# Altium PCB M.2-12V-LED-Regulator-Relay-copy_2024-05-01.pcbdoc
Units mil, origin at the board's own origin, x right, y up, seen from the top; angles counter-clockwise.
Board outline 6628.43 x 3773.75 mil, 2 copper layers (Top Layer, Bottom Layer); 48 components, 48 nets, 209 pads, 73 vias.
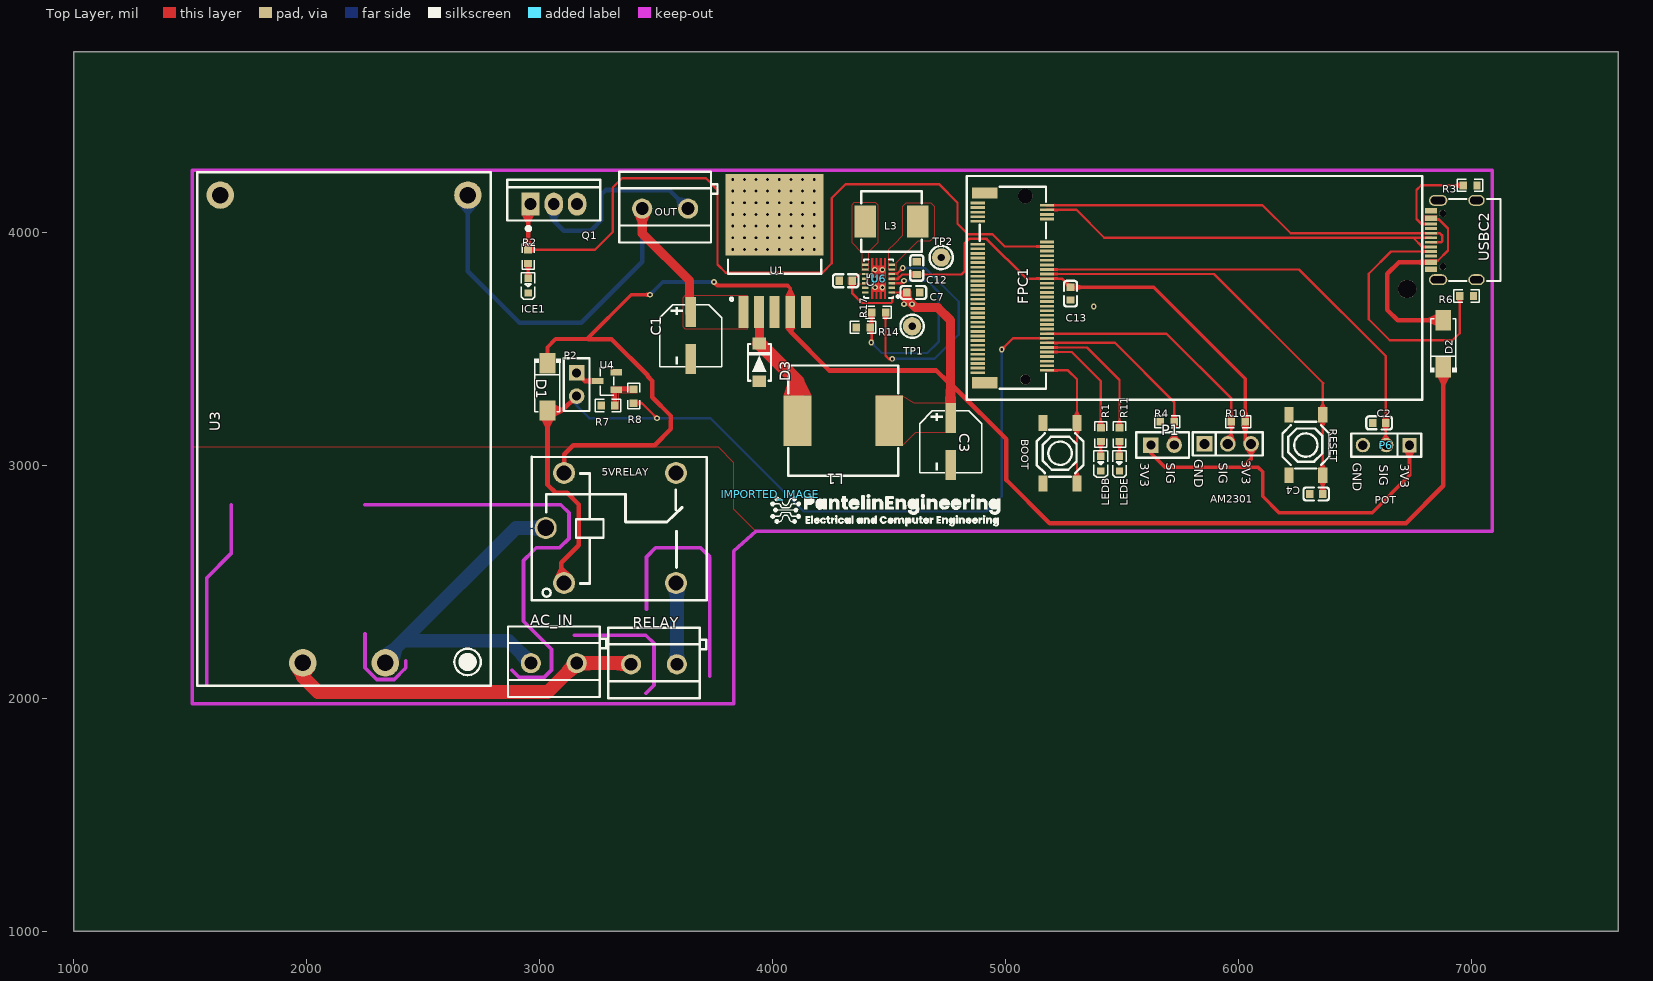
[diagram p0: Top Layer view]
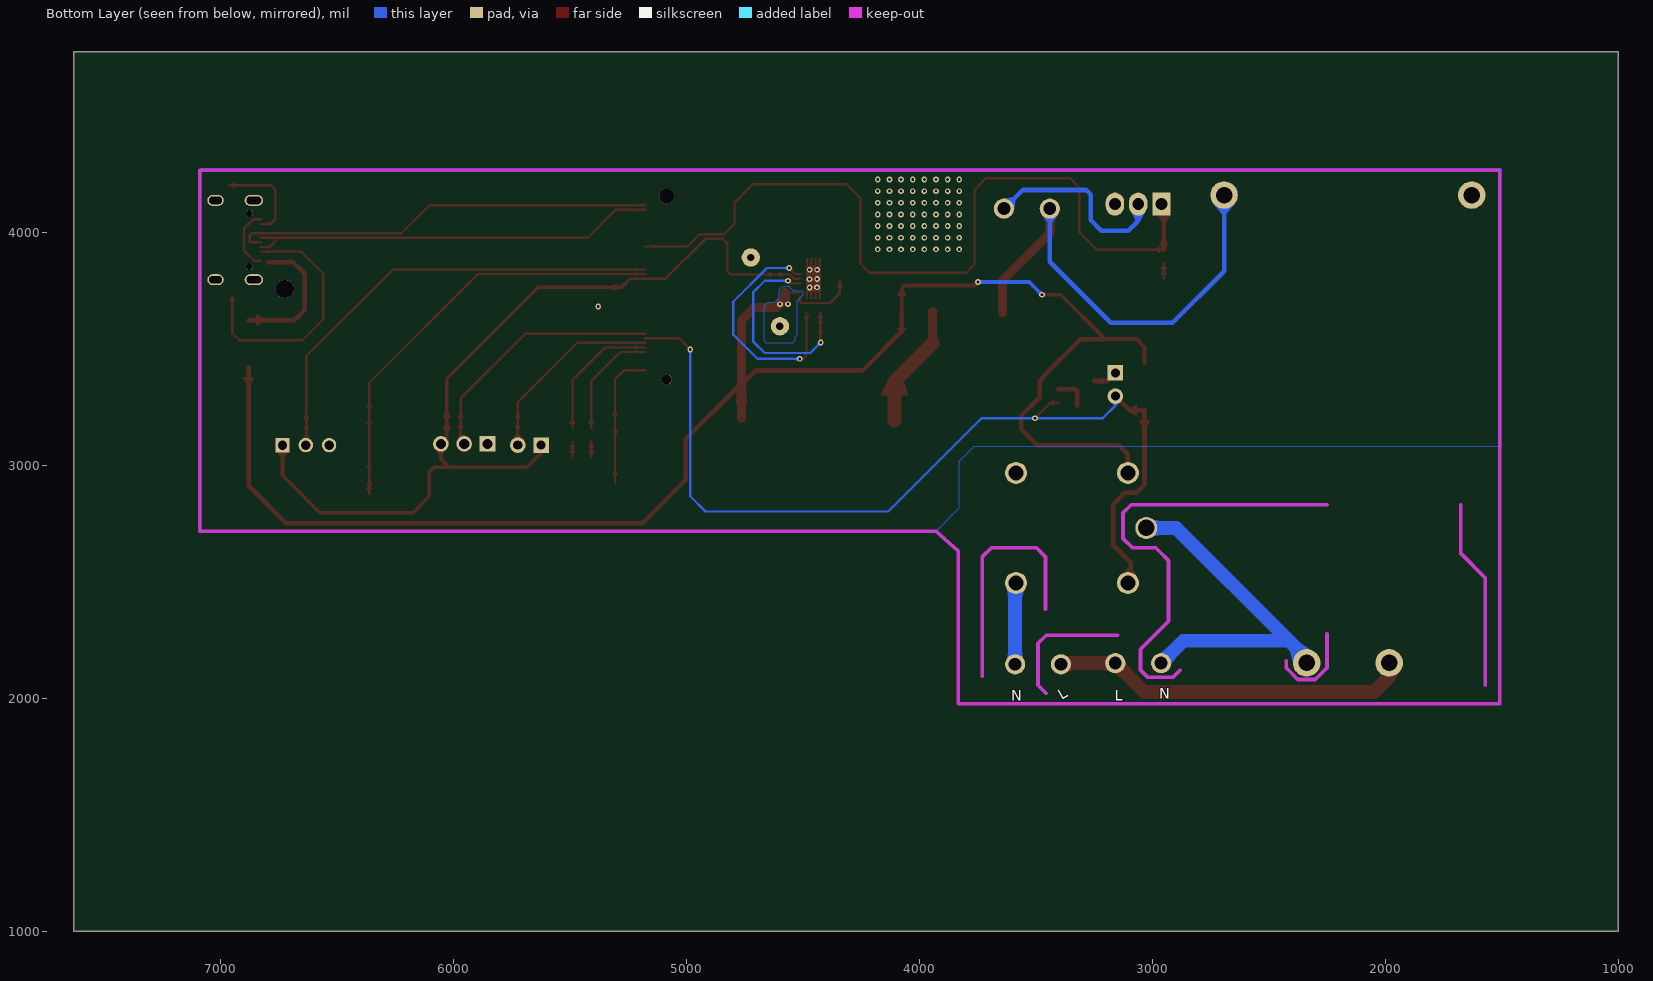
[diagram p1: Bottom Layer view, seen from below]

## Layer stack, top to bottom
Top Layer: signal copper (thickness not stored)
Dielectric: dielectric 12.6, FR-4, Dk 4.8
Bottom Layer: signal copper (thickness not stored)

## Board outline
7628.43,1000 1000,1000 1000,4773.75 7628.43,4773.75

## Components (designator, comment, footprint, x,y, rotation, side; value= is the part's Value field where it differs from the comment)
5VRELAY "SRD-05VDC" RELAY-TH_SRD-03VDC-SL-C 3305,2730.04 r0 top
AC_IN "VLT" CONN-TH_P5.00_KF301-5.0-2P 3060,2150.04 r0 top
AM2301 "1125" CONN-TH_1125-1103S0S113CR01 5952.87,3090.88 r0 top
BOOT "TS-1187A-B-A-B" SW-SMD_4P-L5.1-W5.1-P3.70-LS6.5-TL-2 5232.87,3050.88 r270 top
C1 "330uF" CAP-SMD_BD6.3-L6.6-W6.6-LS7.2-R-RD 3647.87,3555.88 r90 top
C2 "100nF" C0603 6602.87,3180.88 r0 top
C3 "330uF" CAP-SMD_BD6.3-L6.6-W6.6-LS7.2-R-RD 4762.87,3100.88 r90 top
C4 "100nF" C0603 6332.87,2875.88 r0 top
C5 "100n" C0603 4312.87,3790.88 r180 top
C7 "10u" C0603 4602.87,3740.88 r180 top
C12 "22u" C0603 4617.87,3845.88 r270 top
C13 "22u" C0603 5277.87,3735.88 r90 top
D1 "SS14" SMA_L4.2-W2.6-LS5.3-RD 3032.87,3335.88 r270 top
D2 "SS14" SMA_L4.2-W2.6-LS5.3-RD 6877.87,3520.88 r90 top
D3 "SS34" SMA(DO-214AC) 3942.87,3440.88 r90 top
FPC1 "AS0BC21-S30BM-7H" CONN-SMD_AS0BC21-S30BM-7H 5027.87,3760.88 r90 top
ICE1 "MHT192WDT-ICE" LED0603-RD 2950,3770.04 r90 top
IMPORTED_IMAGE "IMPORTED_IMAGE" IMPORTED_IMAGE 3989.91,2874.78 r0 top
L1 "47uH" IND-SMD_L12.0-W12.0_CDRH127NP 4302.87,3190.88 r180 top
L3 "1.5uH" IND-SMD_L7.2-W6.6_GPSR0730 4509.34,4045.23 r180 top
LEDB "FC-DA1608BK-470H10" LED0603-RD 5407.9,3005.9 r90 top
LEDE "XL-1608UGC-04" LED0603-RD_GREEN 5487.87,3005.88 r90 top
OUT "VLT" CONN-TH_P5.00_KF301-5.0-2P 3537.87,4100.88 r0 top
P1 "BUTTON_LED" HDR-TH_2P-P2.54-V-F 5672.86,3085.88 r0 top
P2 "RLY_JUMP" HDR-TH_2P-P2.54-V-F 3157.87,3345.88 r270 top
P6 "Header-Female-2.54_1x3" HDR-TH_3P-P2.54-V-F 6632.87,3085.88 r180 top
Q1 "IRF520P" TO-220-3_L10.0-W4.5-P2.54-T 3060,4120.04 r90 top
R1 "49.9Ω" R0603 5407.87,3130.88 r90 top
R2 "49.9Ω" R0603 2949.98,3895.06 r90 top
R3 "5.1kΩ" R0603 6992.87,4200.88 r180 top
R4 "430Ω" R0603 5692.87,3185.88 r0 top
R6 "5.1kΩ" R0603 6977.87,3725.88 r180 top
R7 "10k" R0603 3292.87,3255.88 r0 top
R8 "220" R0603 3402.87,3295.88 r90 top
R10 "10kΩ" R0603 5997.87,3185.88 r0 top
R11 "49.9Ω" R0603 5487.92,3130.87 r90 top
R14 "180k" R0603 4387.87,3590.88 r0 top
R17 "1M" R0603 4454.34,3655.23 r180 top
RELAY "VLT" CONN-TH_P5.00_KF301-5.0-2P 3490,2145.04 r0 top
RESET "TS-1187A-B-A-B" SW-SMD_4P-L5.1-W5.1-P3.70-LS6.5-TL-2 6287.87,3085.88 r270 top
TP1 "VIN" PKG-TEST-POINT-PTH-1X1 4597.87,3595.88 r180 top
TP2 "GND" PKG-TEST-POINT-PTH-1X1 4722.87,3890.88 r180 top
U1 "LM2596S-5.0" TO-263-5_L10.6-W9.6-P1.70-LS15.9-BR 4007.87,3865.88 r270 top
U3 "HLK-20M05" PWRM-TH_HLK-20MXX 2160,3155.04 r90 top
U4 "IRLML6244TR" SOT-23-3_L2.9-W1.3-P1.90-LS2.4-BR 3287.87,3360.88 r0 top
U6 "TPS63020DSJR" VSON-14_L4.0-W3.0-P0.50-BL-EP_TI_DSJ 4454.34,3800.23 r90 top
USBC2 "TYPE-C-31-M-12" USB-C_SMD-TYPE-C-31-M-12 6922.87,3965.88 r90 top
? "" ? 4297.87,2108.94 r0 top

## Footprints (in the part's own frame and the unit in brackets; to place one, negate y for a bottom-side part, rotate by r counter-clockwise, add the part's x,y. Pads: shape width x height; smd on the part's side, far side on the other; paste and mask are expansions set on the pad)
C0603 [mm]
  rect 0.8x0.9 smd paste+0 mask+0.051: 1(-0.7,0) 2(0.7,0)
  silkscreen extent -1.41,-0.71 1.39,0.72
CAP-SMD_BD6.3-L6.6-W6.6-LS7.2-R-RD [mm]
  rect 3.26x1.15 smd paste+0 mask+0.051: 1(2.555,0) 2(-2.555,0)
  silkscreen extent -3.39,-3.38 3.36,3.38
CONN-SMD_AS0BC21-S30BM-7H [mm]
  rect 0.3x1.55 smd paste+0 mask+0.05: 1(9.25,3.775) 2(9,-3.775) 3(8.75,3.775) 4(8.5,-3.775) 5(8.25,3.775) 6(8,-3.775) 7(7.75,3.775) 8(7.5,-3.775) 9(7.25,3.775) 18(5,-3.775) 19(4.75,3.775) 20(4.5,-3.775) 21(4.25,3.775) 22(4,-3.775) 23(3.75,3.775) 24(3.5,-3.775) 25(3.25,3.775) 26(3,-3.775) 27(2.75,3.775) 28(2.5,-3.775) 29(2.25,3.775) 30(2,-3.775) 31(1.75,3.775) 32(1.5,-3.775) 33(1.25,3.775) 34(1,-3.775) 35(0.75,3.775) 36(0.5,-3.775) 37(0.25,3.775) 38(0,-3.775) 39(-0.25,3.775) 40(-0.5,-3.775) 41(-0.75,3.775) 42(-1,-3.775) 43(-1.25,3.775) 44(-1.5,-3.775) 45(-1.75,3.775) 46(-2,-3.775) 47(-2.25,3.775) 48(-2.5,-3.775) 49(-2.75,3.775) 50(-3,-3.775) 51(-3.25,3.775) 52(-3.5,-3.775) 53(-3.75,3.775) 54(-4,-3.775) 55(-4.25,3.775) 56(-4.5,-3.775) 57(-4.75,3.775) 58(-5,-3.775) 59(-5.25,3.775) 60(-5.5,-3.775) 61(-5.75,3.775) 62(-6,-3.775) 63(-6.25,3.775) 64(-6.5,-3.775) 65(-6.75,3.775) 66(-7,-3.775) 67(-7.25,3.775) 68(-7.5,-3.775) 69(-7.75,3.775) 70(-8,-3.775) 71(-8.25,3.775) 72(-8.5,-3.775) 73(-8.75,3.775) 74(-9,-3.775) 75(-9.25,3.775)
  rect 1.2x2.75 smd paste+0 mask+0.05: 76(-10.35,3) 77(10.35,3)
  round 1.1 hole 1.1 unplated paste+0: ""(-10,-1.42)
  round 1.6 hole 1.6 unplated paste+0: ""(10,-1.42)
  silkscreen extent -11,-3.67 11,3.53
CONN-TH_1125-1103S0S113CR01 [mm]
  rect 1.7x1.7 hole 1.1 paste+0 mask+0.05: 1(-2.54,0)
  round 1.7 hole 1.1 paste+0 mask+0.05: 2(0,0) 3(2.54,0)
  silkscreen extent -3.81,-1.27 3.81,1.27
CONN-TH_P5.00_KF301-5.0-2P [mm]
  round 2.2 hole 1.4 paste+0 mask+0.051: 1(-2.5,0) 2(2.5,0)
  silkscreen extent -5,-3.7 5.71,4
HDR-TH_2P-P2.54-V-F [mm]
  rect 1.7x1.7 hole 1 paste+0 mask+0.051: 1(-1.27,0)
  round 1.7 hole 1 paste+0 mask+0.051: 2(1.27,0)
  silkscreen extent -2.88,-1.39 2.88,1.4
HDR-TH_3P-P2.54-V-F [mil]
  rect 62x62 hole 40.16 paste+0 mask+2: 1(-100,0)
  round 62 hole 40.16 paste+0 mask+2: 2(0,0) 3(100,0)
  silkscreen extent -150,-50 150,50
IMPORTED_IMAGE [mil]
  silkscreen extent 0,-138 986,0
IND-SMD_L7.2-W6.6_GPSR0730 [mm]
  rect 2.35x3.5 smd paste+0 mask+0.051: 1(-2.85,0) 2(2.85,0)
  silkscreen extent -3.3,-3.3 3.3,3.3
IND-SMD_L12.0-W12.0_CDRH127NP [mm]
  rect 3x5.5 smd paste+0 mask+0.051: 1(-5,0) 2(5,0)
  silkscreen extent -6,-6 6,6
LED0603-RD [mm]
  rect 0.8x0.8 smd paste+0 mask+0.051: 1(-0.799,-0.003) 2(0.799,0.004)
  silkscreen extent -1.49,-0.75 1.39,0.76
LED0603-RD_GREEN [mm]
  rect 0.8x0.8 smd paste+0 mask+0.051: 1(-0.799,-0.003) 2(0.799,0.004)
  silkscreen extent -1.49,-0.75 1.39,0.76
PKG-TEST-POINT-PTH-1X1 [mm]
  round 2 hole 0.8 paste+0 mask+0.102: 1(0,0)
  silkscreen extent -1.27,-1.27 1.27,1.27
PWRM-TH_HLK-20MXX [mm]
  round 3 hole 1.8 paste+0 mask+0.051: 1(-25.5,4.5) 2(-25.5,-4.5) 3(25.5,13.5) 4(25.5,-13.5)
  silkscreen extent -28,-16 28,16
R0603 [mil]
  rect 31.75x34.02 smd paste-3937.01 mask+2: 1(-29.65,0) 2(29.66,0)
  silkscreen extent -55,-26 55,26
RELAY-TH_SRD-03VDC-SL-C [mm]
  round 2.4 hole 1.6 paste+0 mask+0.05: 1(-5.1,-6) 2(7.1,-6) 3(7.1,6) 4(-5.1,6)
  round 2.4 hole 1.8 paste+0 mask+0.05: 5(-7.1,0)
  silkscreen extent -8.61,-7.87 10.44,7.75
SMA(DO-214AC) [mil]
  rect 50x57.9 smd paste+0 mask+2: 1(-81,0) 2(81,0)
  silkscreen extent -78,-49 79,49
SMA_L4.2-W2.6-LS5.3-RD [mm]
  rect 2.2x1.7 smd paste+0 mask+0.051: 1(-2.566,0) 2(2.565,0)
  silkscreen extent -3.08,-1.44 2.7,1.44
SOT-23-3_L2.9-W1.3-P1.90-LS2.4-BR [mm]
  rect 1.25x0.7 smd paste+0 mask+0.051: 1(1,-0.95) 2(1,0.95) 3(-1,0)
  silkscreen extent -0.73,-1.53 0.73,1.53
SW-SMD_4P-L5.1-W5.1-P3.70-LS6.5-TL-2 [mm]
  rect 1.7x1 smd paste+0 mask+0.051: 1(-3.3,1.85) 2(3.3,1.85) 3(-3.3,-1.85) 4(3.3,-1.85)
  silkscreen extent -2.55,-2.55 2.55,2.55
TO-220-3_L10.0-W4.5-P2.54-T [mm]
  rect 2.5x2 hole 1.3 paste+0 mask+0.051: 1(0,2.54)
  oval 2.5x2 hole 1.3 paste+0 mask+0.051: 2(0,0) 3(0,-2.54)
  silkscreen extent -2.86,-5.08 2.67,5.08
TO-263-5_L10.6-W9.6-P1.70-LS15.9-BR [mm]
  rect 3.5x1.069 smd paste+0 mask+0.102: 1(5.3,-3.404) 2(5.3,-1.702) 3(5.3,0) 4(5.3,1.702) 5(5.3,3.404)
  rect 8.89x10.66 smd paste+0 mask+0.102: 6(-5.3,0)
  silkscreen extent -0.41,-5.08 4.07,5.08
USB-C_SMD-TYPE-C-31-M-12 [mm]
  oval 1.2x2 hole 0.8 slot 1.6 at 90 deg paste+0 mask+0.051: 0(-4.325,1.706) 1(4.325,1.706)
  oval 1.2x1.8 hole 0.8 slot 1.4 at 90 deg paste+0 mask+0.051: 2(4.325,-2.474) 3(-4.325,-2.474)
  rect 0.3x1.3 smd paste-100 mask+0.051: A1(-3.35,2.474) A4(-2.55,2.474) A5(-1.25,2.474) A6(-0.25,2.474) A7(0.25,2.474) A8(1.25,2.474) A9(2.55,2.474) A12(3.35,2.474) B1(3.05,2.474) B4(2.25,2.474) B5(1.75,2.474) B6(0.75,2.474) B7(-0.75,2.474) B8(-1.75,2.474) B9(-2.25,2.474) B12(-3.05,2.474)
  round 0.75 hole 0.75 unplated paste+0: ""(-2.9,1.206) ""(2.9,1.206)
  silkscreen extent -4.47,-5.09 4.47,0.49
VSON-14_L4.0-W3.0-P0.50-BL-EP_TI_DSJ [mm]
  rect 0.25x0.7 smd paste+0 mask+0.051: 1(-1.5,-1.45) 2(-1,-1.45) 3(-0.5,-1.45) 4(0,-1.45) 5(0.5,-1.45) 6(1,-1.45) 7(1.5,-1.45) 8(1.5,1.45) 9(1,1.45) 10(0.5,1.45) 11(0,1.45) 12(-0.5,1.45) 13(-1,1.45) 14(-1.5,1.45)
  Top Layer region: -2.2,0.79 -2.2,0.59 -1.43,0.59 -1.43,0.33 -2.2,0.33 -2.2,0.13 -1.43,0.13 -1.43,-0.13 -2.2,-0.13 -2.2,-0.33 -1.43,-0.33 -1.43,-0.59 -2.2,-0.59 -2.2,-0.79 2.2,-0.79 2.2,-0.59 1.43,-0.59 1.43,-0.33 2.2,-0.33 2.2,-0.13 1.43,-0.13 1.43,0.13 2.2,0.13 2.2,0.33 1.43,0.33 1.43,0.59 2.2,0.59 2.2,0.79
  silkscreen extent -2.1,-2.23 2.1,1.6
? [mil]

## Free pads (board coordinates)
  round 78.74 hole 78.74 unplated paste+0: ""(6722.87,3755.88)

## Via types
v1: diameter 24.41, hole 12.2, Top Layer to Bottom Layer, tented both sides, 73 vias

## Nets (pads, with @x,y where several pads share a name; then routed paths per layer and width w, separated by ;. In a path a pad name is that pad's centre, name@x,y a point inside that pad or via, vN(x,y) a via of type N, cw(c..) or ccw(c..) an arc to the next point about the centre after c; other vN are vias at no path point)
+3V3: AM2301.3 C12.2 C13.2 FPC1.34 P1.1 P6.1 R10.2 R17.1 U6.4 U6.5 | length 4865
  Top Layer w10: R17.1@4483.97,3655.28 4483.97,3469.78 4497.87,3455.88 v1(4512.87,3455.88) ; U6.4 4537.87,3800.23 4555.96,3818.32 C12.2 4810.27,3818.28 4822.87,3830.88 4822.87,3950.88 4842.87,3970.88 4917.87,3970.88 5088.47,3800.28 FPC1.34 ; U6.5 4531.92,3819.92 v1(4557.87,3845.88) ; FPC1.34@5176.49,3800.25 5241.06,3800.25 C13.2
  Top Layer w15.75: C13.2 5634.72,3763.44 6027.58,3370.58 R10.2@6027.58,3185.88 ; P1.1 5622.86,3050.89 5682.87,2990.88 6017.87,2990.88 ; R10.2 6027.53,3116.22 AM2301.3 6052.87,3025.88 6017.87,2990.88 ; P6.1 6732.87,2955.88 6572.87,2795.88 6172.87,2795.88 6102.87,2865.88 6102.87,2970.88 6082.87,2990.88 6017.87,2990.88
  Bottom Layer w10: v1(4512.87,3455.88) 4692.87,3455.88 4797.87,3559.98 4797.87,3700.88 4652.87,3845.88 v1(4557.87,3845.88)
+5V: 5VRELAY.4 C3.1 C5.1 C7.2 D1.1 D2.1 L1.1 TP1.1 U1.4 U6.1 U6.10 U6.11 U6.12 | length 7422.8
  Top Layer w10: C5.1@4340.47,3790.88 4340.47,3738.28 4382.87,3695.88 4502.87,3695.88 4507.87,3695.88 4512.87,3700.88 4512.87,3720.88 ; U6.1 4511.73,3740.88 C7.2
  Top Layer w15.75: D1.1 3032.87,3505.88 3067.87,3540.88 3202.87,3540.88 3392.87,3730.88 v1(3472.87,3730.88) ; v1(3747.87,3785.88) 3762.87,3770.88 4062.87,3770.88 4074.87,3758.88 U1.4
  Top Layer w19.68: 5VRELAY.4 3104.22,3047.23 3142.87,3085.88 3492.87,3085.88 3562.87,3155.88 3562.87,3210.88 3482.87,3290.88 3482.87,3360.88 3462.87,3380.88 3462.87,3385.88 3307.87,3540.88 3208.29,3540.88 ; U1.4 4074.87,3573.88 4242.87,3405.88 4701.92,3405.88 4752.87,3354.92 ; 4752.87,3359.88 4781.27,3332.48 5002.87,3110.88 5002.87,2935.88 5187.87,2750.88 6717.87,2750.88 6877.87,2910.88 D2.1
  Top Layer w39.37: C7.2 4575.31,3713.44 v1(4597.87,3690.88) 4612.87,3675.88 4707.87,3675.88 4762.87,3620.88 C3.1
  Bottom Layer w15.75: v1(3472.87,3730.88) 3527.87,3785.88 v1(3747.87,3785.88)
  other v1: 4562.87,3690.88
+12V: C1.1 OUT.1 U1.1 U3.4 | length 2033.9
  Top Layer w39.37: OUT.1@3439.47,4100.88 3439.47,3994.28 3642.87,3790.88 C1.1@3642.87,3654.38
  Bottom Layer w19.68: U3.4 2691.47,3832.28 2912.87,3610.88 3177.87,3610.88 3439.47,3872.48 OUT.1@3439.47,4100.88
BOOT: BOOT.1 BOOT.2 FPC1.74 | length 592.3
  Top Layer w10: FPC1.74@5176.49,3406.55 5267.2,3406.55 5305.71,3368.04 BOOT.1 BOOT.2
CC1: R6.2 USBC2.A5 | length 1102.1
  Top Layer w10: USBC2.A5 6653.66,3916.67 6557.87,3820.88 6557.87,3625.88 6647.87,3535.88 6917.87,3535.88 6948.21,3566.22 R6.2
CC2: R3.2 USBC2.B5 | length 404.9
  Top Layer w10: USBC2.B5 6783.97,4034.78 6762.87,4055.88 6762.87,4180.88 6782.87,4200.88 R3.2
EN: C4.2 FPC1.32 RESET.1 RESET.2 | length 1856.7
  Top Layer w10: FPC1.32 5893.81,3819.94 6362.87,3350.88 6360.71,3348.72 RESET.1 6360.72,2985.8 RESET.2 6360.43,2955.68 C4.2
GND: AM2301.1 BOOT.3 BOOT.4 C1.2 C2.1 C3.2 C4.1 C5.2 C7.1 C12.1 C13.1 D3.1 FPC1.23 ICE1.1 LEDB.1 LEDE.1 P6.3 Q1.3 R3.1 R4.1 R6.1 R7.1 R14.1 RESET.3 RESET.4 TP2.1 U1.3 U1.5 U1.6 U3.3 U4.2 U6.2 U6.13 USBC2.0 USBC2.1 USBC2.2 USBC2.3 USBC2.A1 USBC2.A12 USBC2.B1 USBC2.B12
  other v1: 5377.87,3680.88 4470.18,3762.36 4438.89,3762.73 4470.74,3797.54 4437.96,3799.02 4438.14,3838.47 4470.37,3838.1 3827.87,3925.88 3877.87,3925.88 3927.87,3925.88 3977.87,3925.88 4027.87,3925.88 4077.87,3925.88 4127.87,3925.88 4177.87,3925.88 3827.87,3975.88 3877.87,3975.88 3927.87,3975.88 3977.87,3975.88 4027.87,3975.88 4077.87,3975.88 4127.87,3975.88 4177.87,3975.88 3827.87,4025.88 3877.87,4025.88 3927.87,4025.88 3977.87,4025.88 4027.87,4025.88 4077.87,4025.88 4127.87,4025.88 4177.87,4025.88 3827.87,4075.88 3877.87,4075.88 3927.87,4075.88 3977.87,4075.88 4027.87,4075.88 4077.87,4075.88 4127.87,4075.88 4177.87,4075.88 3827.87,4125.88 3877.87,4125.88 3927.87,4125.88 3977.87,4125.88 4027.87,4125.88 4077.87,4125.88 4127.87,4125.88 4177.87,4125.88 3827.87,4175.88 3877.87,4175.88 3927.87,4175.88 3977.87,4175.88 4027.87,4175.88 4077.87,4175.88 4127.87,4175.88 4177.87,4175.88 3827.87,4225.88 3877.87,4225.88 3927.87,4225.88 3977.87,4225.88 4027.87,4225.88 4077.87,4225.88 4127.87,4225.88 4177.87,4225.88
GPIO16: FPC1.20 Q1.1 R2.2 | length 3504.4
  Top Layer w10: R2.2 3236.67,3924.68 3312.87,4000.88 3312.87,4190.88 3352.87,4230.88 3712.87,4230.88 3762.87,4180.88 3762.87,3860.88 3797.87,3825.88 4212.87,3825.88 4252.87,3865.88 4252.87,4145.88 4312.87,4205.88 4712.87,4205.88 4792.87,4125.88 4792.87,4035.88 4837.87,3990.88 4942.87,3990.88 4995.67,3938.08 FPC1.20@5176.47,3938.08
  Top Layer w19.68: R2.2 2949.97,4110.01 Q1.1
GPIO38: FPC1.66 R1.2 | length 483.3
  Top Layer w10: FPC1.66 5283.46,3485.29 5407.87,3360.88 R1.2
GPIO39: FPC1.64 R11.2 | length 574.4
  Top Layer w10: FPC1.64 5348.77,3504.98 5487.92,3365.84 R11.2
ICE1_2: ICE1.2 R2.1 | length 63.9
  Top Layer w10: ICE1.2 R2.1
L: AC_IN.2 RELAY.1 U3.1 | length 1549.4
  Top Layer w59.05: U3.1 1982.84,2090.91 2047.87,2025.88 3034.27,2025.88 AC_IN.2 3386.58,2150.04 RELAY.1
L1_2: D3.2 L1.2 U1.2 | length 534.7
  Top Layer w39.37: U1.2 3942.87,3655.22 D3.2
  Top Layer w59.05: D3.2 4106.02,3358.73 L1.2
L3_1: L3.1 U6.6 U6.7
L3_2: L3.2 U6.8 U6.9
LAMP_BUT: FPC1.62 P1.2 R4.2 | length 836.2
  Top Layer w10: FPC1.62 5469.07,3524.68 5722.57,3270.58 5722.57,3185.88 P1.2
LED_POT: C2.2 FPC1.30 P6.2 | length 1991.2
  Top Layer w10: FPC1.30 6259.13,3839.62 6630.43,3468.32 C2.2 6630.43,3088.31 P6.2
LEDE_2: LEDE.2 R11.1 | length 63.8
  Top Layer w10: LEDE.2@5487.77,3037.38 R11.1
N: 5VRELAY.5 AC_IN.1 U3.2 | length 1527.7
  Bottom Layer w59.05: U3.2 2337.17,2170.18 2412.87,2245.88 ; AC_IN.1 2865.74,2245.88 2412.87,2245.88 ; 5VRELAY.5 2897.03,2730.04 2412.87,2245.88
N1: 5VRELAY.2 RELAY.2 | length 350.4
  Bottom Layer w59.05: 5VRELAY.2 3588.43,2489.92 RELAY.2
Q2: P2.1 U4.3 | length 105.1
  Top Layer w19.68: P2.1 3192.88,3360.88 U4.3
R1_1: LEDB.2 R1.1 | length 63.8
  Top Layer w10: LEDB.2 R1.1
R9: R7.2 R8.2 U4.1 | length 146
  Top Layer w19.68: R7.2 3322.53,3318.77 U4.1 3329.3,3325.54 R8.2
R17_2: R14.2 R17.2 U6.3 | length 895.9
  Top Layer w10: v1(4422.87,3525.88) 4424.68,3527.69 R17.2 ; U6.3 4552.55,3780.55 v1(4562.87,3790.88)
  Bottom Layer w10: v1(4422.87,3525.88) 4467.87,3480.88 4662.87,3480.88 4712.87,3530.88 4712.87,3620.18 4712.87,3740.88 4662.87,3790.88 v1(4562.87,3790.88)
RELAY: 5VRELAY.1 D1.2 FPC1.60 P2.2 R8.1 | length 4063.4
  Top Layer w10: R8.1 3437.53,3266.22 v1(3502.87,3200.88) ; v1(4982.87,3495.88) 5031.34,3544.35 FPC1.60
  Top Layer w19.68: D1.2 3032.87,2915.88 3067.87,2880.88 3117.87,2880.88 3167.87,2830.88 3167.87,2655.88 3092.87,2580.88 3092.87,2505.18 5VRELAY.1 ; D1.2 3096.88,3234.88 P2.2
  Bottom Layer w10: P2.2 3157.87,3255.88 3212.87,3200.88 v1(3502.87,3200.88) 3732.87,3200.88 4132.87,2800.88 4917.87,2800.88 4982.87,2865.88 v1(4982.87,3495.88)
S$22309: 
S$46051: 
S$46061: 
S$46068: 
S$46072: 
S$46076: 
S$46080: 
S$46084: 
S$46455: 
S$46459: 
S$46463: 
S$46500: 
S$47148: 
S$55273: 
S$56016: 
S$56020: 
S$56024: 
TEMP&HUM: AM2301.2 FPC1.58 R10.1 | length 1108.1
  Top Layer w10: FPC1.58 5689.72,3564.03 5968.21,3285.54 R10.1 5968.22,3106.22 AM2301.2
USBD+: FPC1.2 USBC2.A6 USBC2.B6 | length 1823.8
  Top Layer w10: FPC1.2 6102.17,4115.18 6223.37,3995.38 USBC2.B6 6863.37,3995.38 6872.87,3985.88 6872.87,3960.88 6867.67,3956.08 USBC2.A6@6825.47,3956.08
USBD-: FPC1.4 USBC2.A7 USBC2.B7 | length 1792.4
  Top Layer w10: FPC1.4 5303.22,4095.53 5423.03,3975.72 USBC2.A7 ; 6747.97,3975.68 6749.07,3975.68 6788.37,3936.38 USBC2.B7@6825.47,3936.38
V-: OUT.2 Q1.2 | length 835.4
  Bottom Layer w19.68: Q1.2@3059.97,4120.08 3059.97,4048.78 3102.87,4005.88 3217.87,4005.88 3262.87,4050.88 3262.87,4160.88 3282.87,4180.88 3556.27,4180.88 OUT.2
VBUS: D2.2 USBC2.A4 USBC2.A9 USBC2.B4 USBC2.B9 | length 862.8
  Top Layer w10: USBC2.B9 6854.27,3877.28 6897.87,3920.88 6897.87,4015.88 6859.27,4054.48 USBC2.B4
  Top Layer w19.68: 6792.87,3870.88 6687.87,3870.88 6637.87,3820.88 6637.87,3665.88 6681.87,3621.88 D2.2
pads on no net: 5VRELAY.3 FPC1. FPC1.1 FPC1.3 FPC1.5 FPC1.6 FPC1.7 FPC1.8 FPC1.9 FPC1.18 FPC1.19 FPC1.21 FPC1.22 FPC1.24 FPC1.25 FPC1.26 FPC1.27 FPC1.28 FPC1.29 FPC1.31 FPC1.33 FPC1.35 FPC1.36 FPC1.37 FPC1.38 FPC1.39 FPC1.40 FPC1.41 FPC1.42 FPC1.43 FPC1.44 FPC1.45 FPC1.46 FPC1.47 FPC1.48 FPC1.49 FPC1.50 FPC1.51 FPC1.52 FPC1.53 FPC1.54 FPC1.55 FPC1.56 FPC1.57 FPC1.59 FPC1.61 FPC1.63 FPC1.65 FPC1.67 FPC1.68 FPC1.69 FPC1.70 FPC1.71 FPC1.72 FPC1.73 FPC1.75 FPC1.76 FPC1.77 U6.14 USBC2. USBC2.A8 USBC2.B8

## Polygon pours and split planes (outlines as drawn)
+5V on Bottom Layer (solid): 4497.87,3745.88 4527.87,3745.88 4537.87,3745.88 4552.87,3760.88 4552.87,3765.88 4587.87,3765.88 4602.87,3750.88 4602.87,3715.88 4622.87,3695.88 4652.87,3695.88 4667.87,3680.88 4667.87,3655.88 4667.87,3535.88 4657.87,3525.88 4637.87,3525.88 4542.87,3525.88 4532.87,3535.88 4532.87,3550.88 4522.87,3560.88 4522.87,3705.88 4497.87,3730.88 4497.87,3745.88
GND on Bottom Layer (solid): 1502.87,4270.88 7082.87,4270.88 7082.87,2720.88 3922.87,2720.88 3827.87,2815.88 3827.87,3015.88 3762.87,3080.88 1502.87,3080.88
VBUS on Top Layer (solid): 6797.87,4070.88 6797.87,4065.88 6797.87,4050.88 6852.87,4050.88 6852.87,4070.88
+12V on Top Layer (solid): 3892.87,3725.88 3622.87,3725.88 3612.87,3715.88 3612.87,3595.88 3622.87,3585.88 3892.87,3585.88 3892.87,3725.88
VBUS on Top Layer (solid): 6802.87,3880.88 6847.87,3880.88 6847.87,3860.88 6782.87,3860.88 6777.87,3860.88 6772.87,3865.88 6772.87,3875.88 6777.87,3880.88 6847.87,3880.88
L3_1 on Top Layer (solid): 4497.87,3835.88 4497.87,3865.88 4497.87,3925.88 4522.87,3950.88 4557.87,3985.88 4557.87,4110.88 4572.87,4125.88 4677.87,4125.88 4692.87,4110.88 4692.87,3980.88 4672.87,3960.88 4622.87,3960.88 4587.87,3925.88 4527.87,3865.88 4527.87,3835.88
L3_2 on Top Layer (solid): 4382.87,3835.88 4412.87,3835.88 4412.87,3915.88 4452.87,3955.88 4452.87,4115.88 4442.87,4125.88 4347.87,4125.88 4337.87,4115.88 4337.87,3955.88 4382.87,3910.88 4382.87,3835.88
+5V on Top Layer (solid): 4497.87,3745.88 4527.87,3745.88 4537.87,3745.88 4552.87,3760.88 4552.87,3765.88 4587.87,3765.88 4602.87,3750.88 4602.87,3715.88 4622.87,3695.88 4652.87,3695.88 4667.87,3680.88 4667.87,3655.88 4667.87,3535.88 4657.87,3525.88 4637.87,3525.88 4542.87,3525.88 4532.87,3535.88 4532.87,3550.88 4522.87,3560.88 4522.87,3705.88 4497.87,3730.88 4497.87,3745.88
+5V on Top Layer (solid): 4407.87,3820.88 4407.87,3775.88 4322.87,3775.88 4322.87,3805.88 4357.87,3805.88 4372.87,3820.88 4407.87,3820.88
+3V3 on Top Layer (solid): 4497.87,3825.88 4497.87,3795.88 4537.87,3795.88 4537.87,3820.88 4532.87,3825.88
+5V on Top Layer (solid): 4442.87,3085.88 4557.87,3085.88 4612.87,3140.88 4782.87,3140.88 4782.87,3265.88 4607.87,3265.88 4557.87,3295.88 4442.87,3295.88 4442.87,3085.88
GND on Top Layer (solid): 1507.87,4265.88 7087.87,4265.88 7087.87,2715.88 3927.87,2715.88 3832.87,2810.88 3832.87,3010.88 3767.87,3075.88 1507.87,3075.88
R9 on Top Layer (solid): 3307.87,3335.88 3307.87,3240.88 3337.87,3240.88 3337.87,3310.88 3347.87,3310.88 3417.87,3310.88 3417.87,3335.88 3307.87,3335.88

## Other copper
Top Layer:
  region net BOOT: 5207,3400.65 5207,3412.46 5222,3411.55 5222,3401.55
  region net GPIO38: 5207,3479.39 5207,3491.2 5222,3490.29 5222,3480.29
  region net GPIO39: 5207,3499.07 5207,3510.88 5222,3509.98 5222,3499.98
  region net LAMP_BUT: 5207,3518.76 5207,3530.57 5222,3529.68 5222,3519.68
  region net RELAY: 5145.98,3550.25 5145.98,3538.44 5130.98,3539.35 5130.98,3549.35
  region net TEMP&HUM: 5207,3558.13 5207,3569.94 5222,3569.03 5222,3559.03
  region net +3V3: 5207,3794.35 5207,3806.16 5222,3805.25 5222,3795.25
  region net +3V3: 5145.98,3806.16 5145.98,3794.35 5130.98,3795.28 5130.98,3805.28
  region net EN: 5207,3814.03 5207,3825.84 5222,3824.94 5222,3814.94
  region net LED_POT: 5207,3833.72 5207,3845.53 5222,3844.62 5222,3834.62
  region net GPIO16: 5145.98,3943.96 5145.98,3932.14 5130.98,3933.08 5130.98,3943.08
  region net USBD-: 5207,4089.62 5207,4101.43 5222,4100.53 5222,4090.53
  region net USBD+: 5207,4109.31 5207,4121.12 5222,4120.18 5222,4110.18
  region net TEMP&HUM: 5955.72,3168.87 5980.72,3168.87 5973.22,3153.87 5963.22,3153.87
  region net TEMP&HUM: 5980.72,3202.89 5955.72,3202.89 5963.22,3217.89 5973.22,3217.89
  region net +3V3: 6011.65,3202.89 6043.41,3202.89 6035.45,3226.51 6019.7,3226.51
  region net +3V3: 6043.41,3168.87 6011.65,3168.87 6019.66,3145.25 6035.41,3145.25
  region net LAMP_BUT: 5735.09,3168.87 5710.09,3168.87 5717.64,3153.87 5727.64,3153.87
  region net LAMP_BUT: 5710.08,3202.89 5735.08,3202.89 5727.58,3217.89 5717.58,3217.89
  region net +3V3: 6752.56,3054.88 6713.19,3054.88 6725,3031.26 6740.75,3031.26
  region net EN: 6347.93,2893.6 6372.93,2893.6 6365.43,2908.6 6355.43,2908.6
  region net GPIO16: 2974.58,4070.84 2925.37,4070.84 2940.13,4041.31 2959.82,4041.31
  region net LEDE_2: 5475.35,3085.34 5500.35,3085.34 5492.83,3070.34 5482.83,3070.34
  region net GPIO39: 5475.42,3176.4 5500.42,3176.4 5492.92,3191.4 5482.92,3191.4
  region net R1_1: 5395.35,3085.35 5420.35,3085.35 5412.83,3070.35 5402.83,3070.35
  region net GPIO38: 5395.37,3176.41 5420.37,3176.41 5412.87,3191.41 5402.87,3191.41
  region net EN: 6372.93,2922.49 6347.93,2922.49 6355.43,2907.49 6365.43,2907.49
  region net EN: 6348.22,2989.42 6373.22,2989.42 6365.72,3004.42 6355.72,3004.42
  region net EN: 6373.22,3182.33 6348.22,3182.33 6355.72,3167.33 6365.72,3167.33
  region net EN: 6348.22,3249.27 6373.22,3249.27 6365.72,3264.27 6355.72,3264.27
  region net LEDE_2: 5475.3,3053.1 5500.3,3053.1 5492.82,3068.1 5482.82,3068.1
  region net R1_1: 5395.3,3053.13 5420.3,3053.13 5412.82,3068.13 5402.82,3068.13
  region net CC1: 6960.72,3708.87 6935.72,3708.87 6943.22,3693.87 6953.22,3693.87
  region net CC2: 6947.34,4188.38 6947.34,4213.38 6932.34,4205.88 6932.34,4195.88
  region net VBUS: 6844.41,3597.27 6844.41,3646.49 6814.88,3631.72 6814.88,3612.04
  region net +5V: 6902.48,3376.57 6853.27,3376.57 6868.03,3347.04 6887.72,3347.04
  region net RELAY: 3066.34,3259.49 3066.34,3210.27 3095.87,3225.04 3095.87,3244.72
  region net RELAY: 3057.48,3191.57 3008.27,3191.57 3023.03,3162.04 3042.72,3162.04
  region net BOOT: 5293.22,2954.42 5318.22,2954.42 5310.72,2969.42 5300.72,2969.42
  region net BOOT: 5293.22,3214.27 5318.22,3214.27 5310.72,3229.27 5300.72,3229.27
  region net BOOT: 5318.22,3147.33 5293.22,3147.33 5300.72,3132.33 5310.72,3132.33
  region net VBUS: 6851.06,4060.37 6851.06,4048.55 6859.28,4049.48 6859.28,4059.48
  region net VBUS: 6851.06,3883.2 6851.06,3871.39 6854.28,3872.28 6854.28,3882.28
  region net CC2: 6799.88,4028.87 6799.88,4040.69 6784.88,4039.78 6784.88,4029.78
  region net USBD+: 6799.88,3989.5 6799.88,4001.32 6784.88,4000.38 6784.88,3990.38
  region net USBD+: 6851.06,4001.32 6851.06,3989.5 6863.37,3990.38 6863.37,4000.38
  region net USBD-: 6799.87,3969.81 6799.87,3981.63 6784.87,3980.72 6784.87,3970.72
  region net USBD+: 6851.06,3961.95 6851.06,3950.13 6866.06,3951.08 6866.06,3961.08
  region net USBD-: 6799.87,3930.44 6799.87,3942.26 6788.37,3941.38 6788.37,3931.38
  region net CC1: 6799.88,3910.76 6799.88,3922.58 6784.88,3921.67 6784.88,3911.67
  region net ICE1_2: 2937.45,3849.53 2962.45,3849.53 2954.93,3834.53 2944.93,3834.53
  region net GPIO16: 2966.99,3937.18 2966.99,3912.18 2981.99,3919.68 2981.99,3929.68
  region net GPIO16: 2932.97,3940.59 2966.99,3940.59 2959.82,3970.12 2940.13,3970.12
  region net ICE1_2: 2937.4,3817.26 2962.4,3817.26 2954.92,3832.26 2944.92,3832.26
  region net +3V3: 5642.55,3052.41 5603.18,3052.41 5614.99,3050.89 5630.74,3050.89
  region net LED_POT: 6617.93,3198.6 6642.93,3198.6 6635.43,3213.6 6625.43,3213.6
  region net LED_POT: 6642.93,3163.16 6617.93,3163.16 6625.43,3148.16 6635.43,3148.16
  region net RELAY: 3419.88,3253.72 3419.88,3278.72 3434.88,3271.22 3434.88,3261.22
  region net Q2: 3223.9,3347.1 3223.9,3374.66 3194.37,3370.72 3194.37,3351.04
  region net +5V: 4095.93,3588.32 4053.83,3588.32 4065.03,3573.88 4084.72,3573.88
  region net +5V: 4055.19,3726.12 4094.56,3726.12 4082.75,3749.74 4067,3749.74
  region net L1_2: 4046.97,3299.15 4165.08,3299.15 4132.87,3365.88 4066.65,3358.73
  region net +3V3: 4471.47,3638.23 4496.47,3638.23 4488.97,3623.23 4478.97,3623.23
  region net R17_2: 4437.19,3638.23 4412.19,3638.23 4419.69,3623.23 4429.69,3623.23
  region net R17_2: 4412.19,3607.89 4433.41,3607.89 4429.69,3622.89 4419.69,3622.89
  region net R17_2: 4433.41,3573.87 4412.19,3573.87 4419.69,3558.87 4429.69,3558.87
  region net +3V3: 5260.16,3766.89 5281.93,3779.19 5262.78,3785.6 5253.74,3780.5
  region net +3V3: 5295.59,3779.19 5295.59,3747.69 5319.21,3755.57 5319.21,3771.31
  region net +3V3: 4600.16,3805.82 4600.16,3830.82 4585.16,3823.32 4585.16,3813.32
  region net +3V3: 4635.59,3830.78 4635.59,3805.78 4650.59,3813.28 4650.59,3823.28
  region net +5V: 4352.97,3773.16 4327.97,3773.16 4335.47,3758.16 4345.47,3758.16
  region net +5V: 4740.24,3265.64 4785.51,3265.64 4782.56,3324.7 4743.19,3324.7
  region net +5V: 3464.8,3721.73 3464.8,3740.03 3456.26,3738.75 3456.26,3723.01
  region net +5V: 3760.05,3786.64 3747.11,3773.7 3754.06,3768.56 3765.19,3779.7
  region net RELAY: 3503.64,3213.06 3490.69,3200.11 3487.59,3209.09 3494.66,3216.16
  region net RELAY: 4995.06,3495.11 4982.11,3508.06 4991.09,3511.16 4998.16,3504.09
  region net +3V3: 4504.8,3446.73 4504.8,3465.03 4497.87,3460.88 4497.87,3450.88
  region net +3V3: 4558.64,3833.7 4545.69,3846.64 4542.59,3837.66 4549.66,3830.59
  region net R17_2: 4432.85,3532.91 4414.65,3534.9 4419.69,3542.94 4429.69,3541.85
  region net R17_2: 4563.64,3778.7 4550.69,3791.64 4549.01,3784.09 4556.08,3777.02
  region net L: 3365.8,2179.83 3360.29,2115.11 3330.32,2120.51 3335.35,2179.57
  region net LED_POT: 6654.9,3107.68 6608.48,3104.99 6625.43,3127.71 6635.43,3128.29
  region net +3V3: 6019.48,3088.78 6054.97,3124.28 6033.1,3121.79 6021.96,3110.65
  region net +3V3: 6077.97,3068.74 6027.78,3068.74 6045,3045.32 6060.75,3045.32
  region net TEMP&HUM: 5983.96,3103.27 5936.69,3120.17 5963.22,3135.57 5973.22,3131.99
  region net RELAY: 3133.59,2530.83 3063.83,2518.33 3083.03,2555.37 3102.72,2558.89
  region net L: 3161.15,2106.82 3115.21,2152.75 3095.87,2129.23 3137.62,2087.47
  region net L: 3187.08,2117.56 3187.08,2182.52 3217.4,2179.57 3217.4,2120.51
  region net L: 2027.14,2112.04 1938.55,2112.04 1953.32,2090.91 2012.37,2090.91
  region net LAMP_BUT: 5747.89,3108.1 5697.69,3107.93 5717.71,3131.42 5727.71,3131.46
  region net +12V: 3471.95,4072.24 3406.99,4072.22 3419.79,4041.91 3459.16,4041.93
Bottom Layer:
  region net V-: 3084.59,4079.45 3035.38,4079.48 3050.13,4049.94 3069.82,4049.93
  region net +5V: 3485.05,3730.11 3472.11,3743.06 3479.06,3748.2 3490.19,3737.06
  region net +5V: 3739.8,3776.73 3739.8,3795.03 3731.26,3793.75 3731.26,3778.01
  region net RELAY: 3494.8,3191.73 3494.8,3210.03 3486.26,3205.88 3486.26,3195.88
  region net RELAY: 3510.95,3191.73 3510.95,3210.03 3519.49,3205.88 3519.49,3195.88
  region net RELAY: 4973.72,3487.81 4992.03,3487.81 4987.87,3479.26 4977.87,3479.26
  region net +3V3: 4520.95,3446.73 4520.95,3465.03 4529.49,3460.88 4529.49,3450.88
  region net +3V3: 4565.95,3836.73 4565.95,3855.03 4574.49,3850.88 4574.49,3840.88
  region net R17_2: 4435.06,3526.64 4422.11,3513.7 4431.09,3510.59 4438.16,3517.66
  region net R17_2: 4570.95,3781.73 4570.95,3800.03 4579.49,3795.88 4579.49,3785.88
  region net N1: 3620.92,2173.68 3555.96,2173.68 3558.91,2204 3617.96,2204
  region net N1: 3551.06,2460.48 3621.8,2464.78 3617.96,2431.41 3558.91,2427.82
  region net N: 2994.24,2694.61 2994.24,2765.47 2961.17,2759.57 2961.17,2700.51
  region net N: 2964.3,2193.26 2918.36,2147.33 2899.01,2170.85 2940.77,2212.61
  region net +12V: 2735.78,4119.9 2647.2,4119.93 2681.63,4078.58 2701.32,4078.58
  region net N: 2395.9,2157.34 2323.64,2208.58 2359.25,2234.01 2408.11,2199.36
  region net RELAY: 3182.97,3273.74 3132.78,3273.74 3152.87,3255.88 3162.87,3255.88
  region net V-: 3639,4144.1 3593.08,4098.15 3587.64,4135.59 3601.55,4149.52
  region net +12V: 3471.95,4072.24 3406.99,4072.22 3429.63,4041.92 3449.32,4041.92

## Silkscreen, mask and mechanical layers (free items; w line width, h text height)
Top Overlay:
  lines w10 net S$22309: 4832.87,4240.88 4832.87,3280.88 6787.87,3280.88 6787.87,4240.88 4837.87,4240.88
  text "GND" at 5808.19,3025.88 h39.37 r270
  text "3V3" at 6013.19,3020.88 h39.37 r270
  text "3V3" at 5578.19,3010.88 h39.37 r270
  text "SIG" at 5688.19,3010.88 h39.37 r270
  text "SIG" at 5913.19,3010.88 h39.37 r270
  text "GND" at 6488.19,3010.88 h39.37 r270
  text "3V3" at 6693.19,3005.88 h39.37 r270
  text "SIG" at 6603.19,3000.88 h39.37 r270
  text "POT" at 6582.87,2834.28 h33.19
Bottom Overlay:
  text "N" at 2970,1997.54 h45
  text "L" at 3388.75,1990.55 h45 r330
  text "L" at 3160,1987.54 h45
  text "N" at 3605,1987.54 h45